# Altium PCB L电感测试仪.PCBDOC
Units mil, origin at the board's own origin, x right, y up, seen from the top; angles counter-clockwise.
Board outline 6000 x 4000 mil, 2 copper layers (Top Layer, Bottom Layer); 31 components, 45 nets, 243 pads, 0 vias.
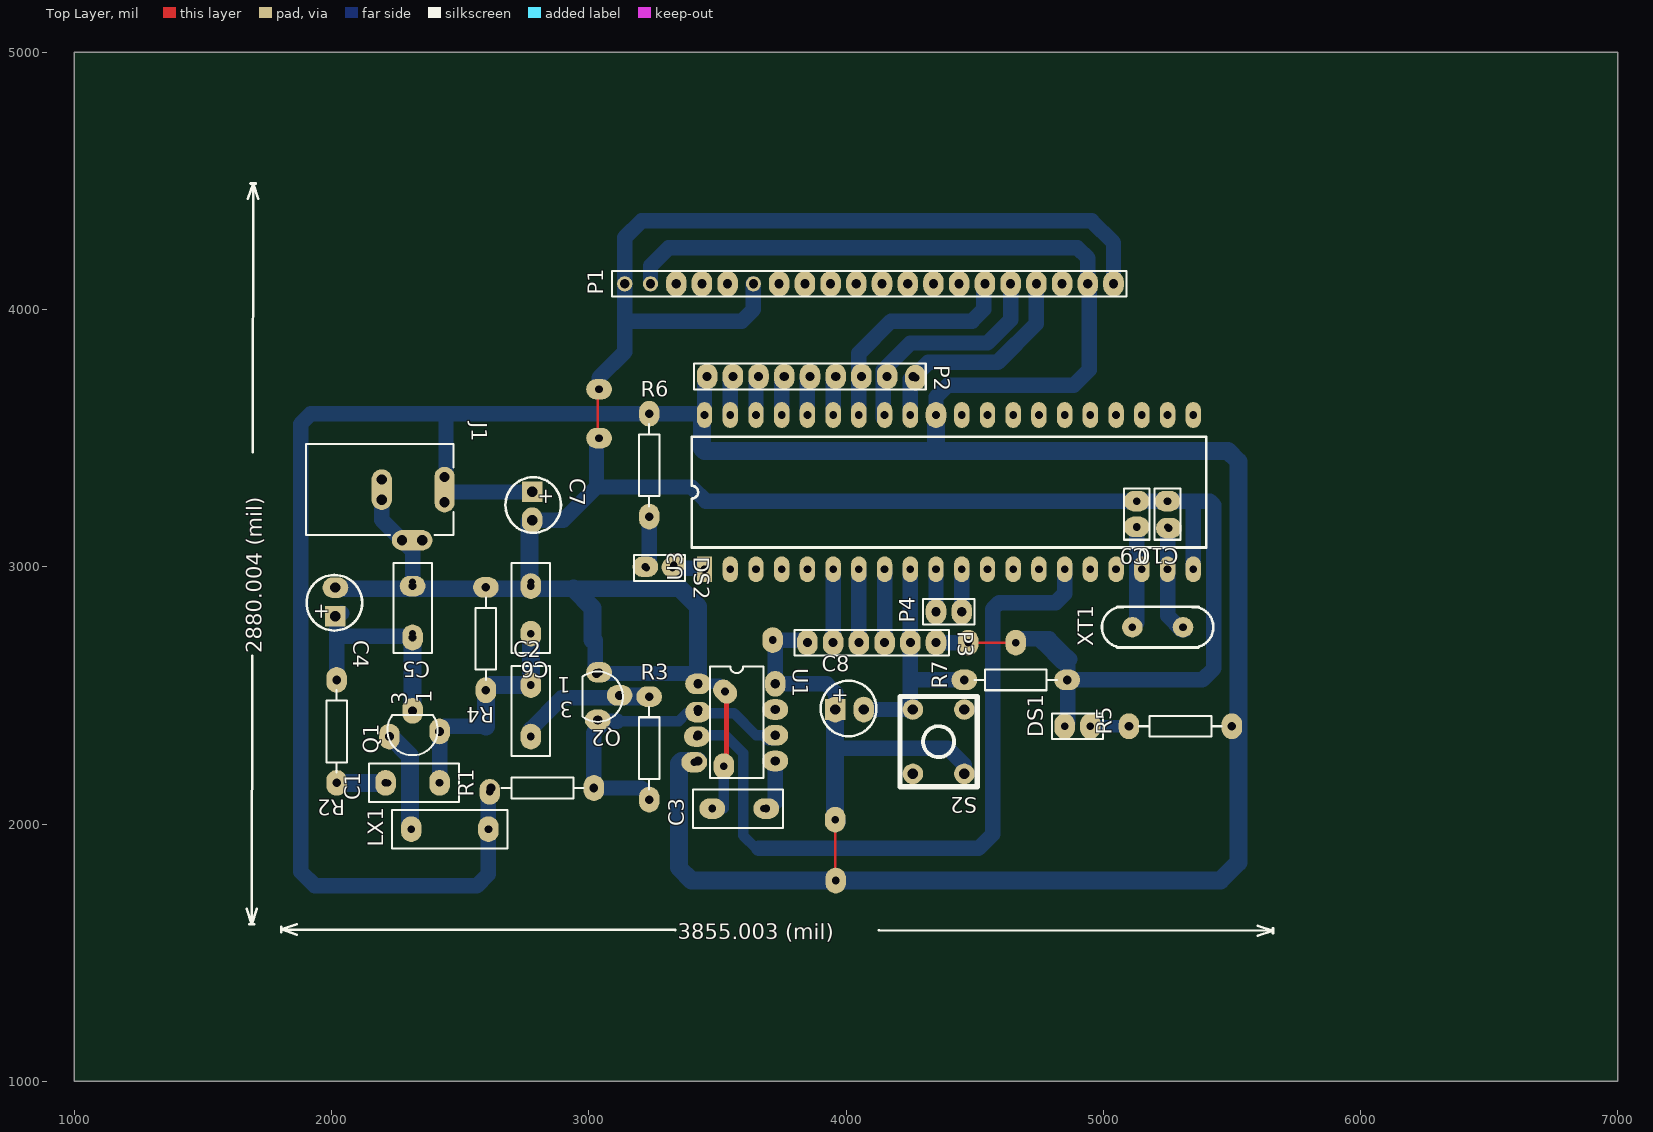
[diagram p0: Top Layer view]
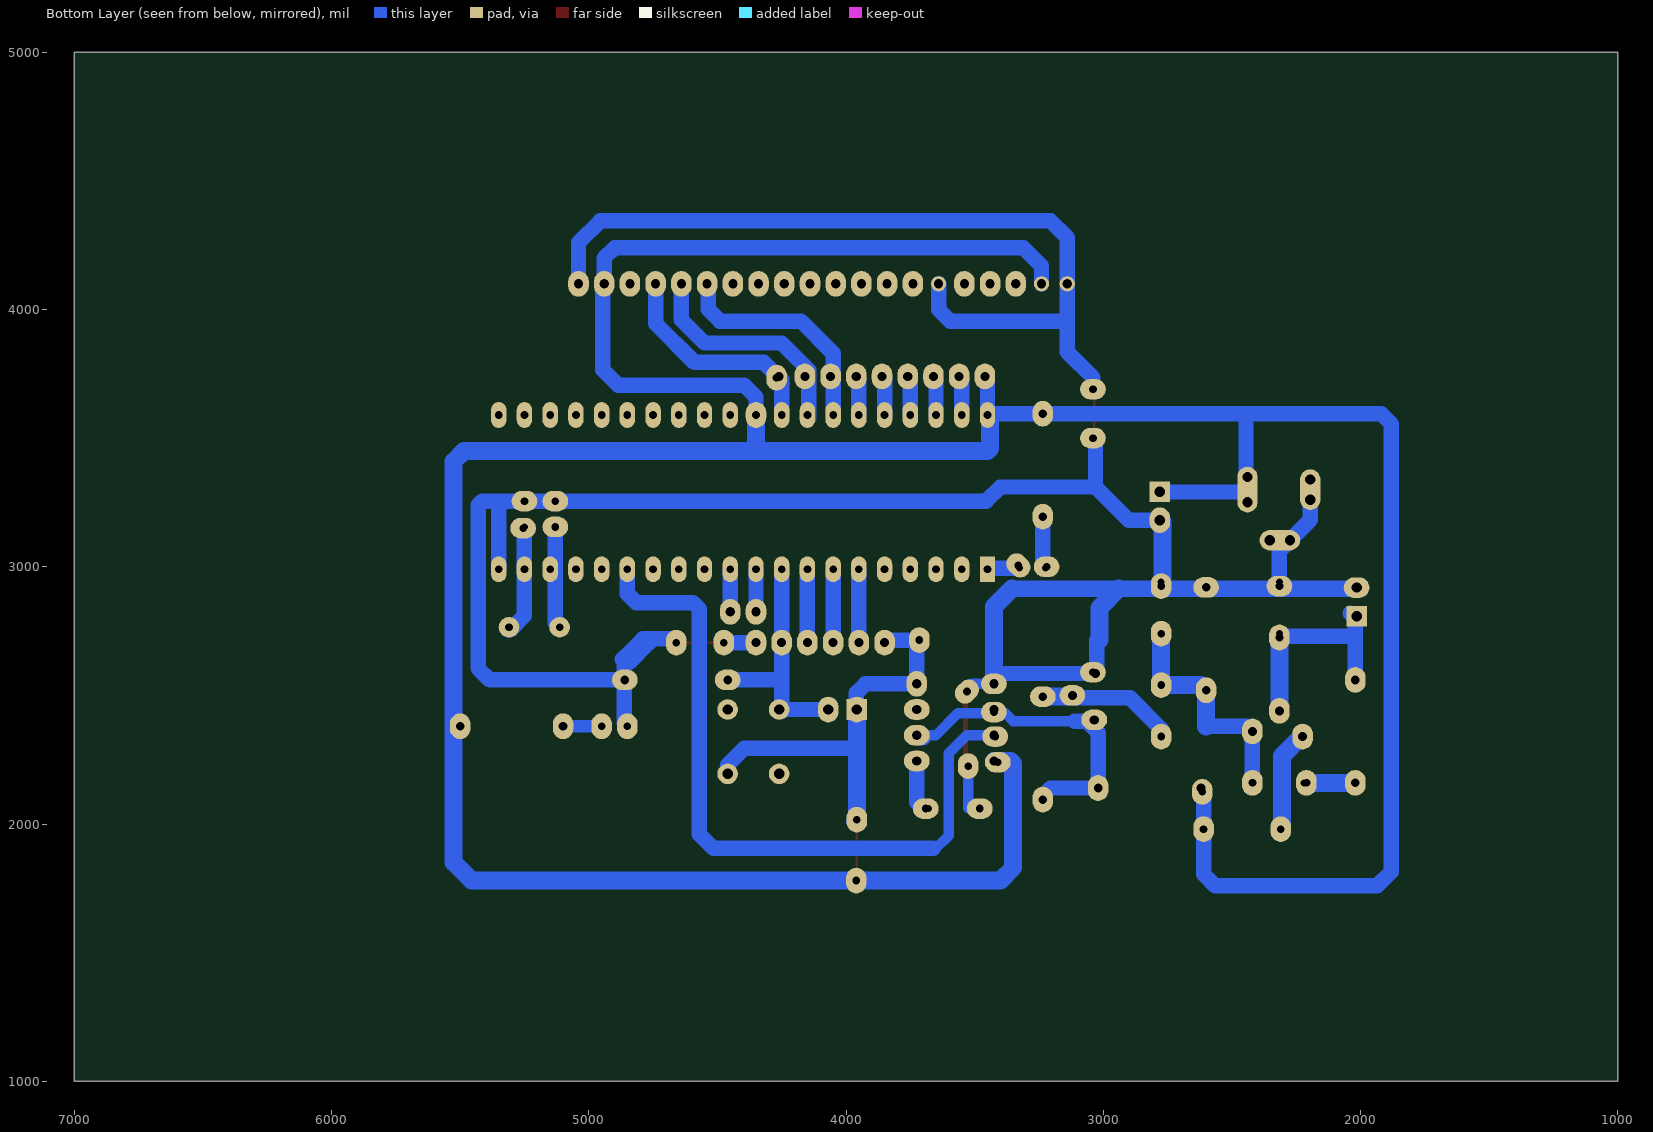
[diagram p1: Bottom Layer view, seen from below]

## Layer stack, top to bottom
Top Solder: solder mask 0.4, Solder Resist, Dk 3.5
Top Layer: signal copper 1.4
Dielectric1: dielectric 12.6, FR-4, Dk 4.8
Bottom Layer: signal copper 1.4
Bottom Solder: solder mask 0.4, Solder Resist, Dk 3.5

## Board outline
1000,1000 7000,1000 7000,5000 1000,5000

## Design rules (kind name [scope] priority, off if disabled: settings)
Clearance [All] p1: gap=10 ignorepadtopadclearanceinfootprint=FALSE except(0: Arc-Hole Track-Hole SMDPad-Hole THPad-Hole Via-Hole Fill-Hole Poly-Hole Region-Hole Text-Hole)
FabricationTestPointUsage TestPointUsage [All] p1: valid=0 allowmultiple=FALSE
FabricationTestpoint Testpoint [All] p1: side=3 testpointundercomponent=TRUE minsize=40 maxsize=100 preferedsize=60 minholesize=0 maxholesize=40 preferedholesize=32 testpointgrid=1 allowsidetop=TRUE allowsidebottom=TRUE usegrid=TRUE gridtolerance=0.01
PolygonConnect [All] p1: connectstyle=Relief reliefconductorwidth=10 reliefentries=4 polygonreliefangle="90 Angle" airgapwidth=10
RoutingVias [All] p1: holewidth=28 width=50 viastyle="Through Hole" minholewidth=28 minwidth=50 maxholewidth=28 maxwidth=50
SolderMaskExpansion [All] p1: expansion=4
Width [All] p1: maxlimit=100 minlimit=10 preferedwidth=60 toplayer_prefwidth=10 minimp=50.000000 maximp=50.000000 favimp=50.000000
28 further rules are at their usual default settings.

## Components (designator, comment, footprint, x,y, rotation, side; value= is the part's Value field where it differs from the comment)
C1 "Cap" RAD-0.2 2320,2160 r180 top
C2 "Cap" RAD-0.2 2775,2440 r90 top
C3 "Cap" RAD-0.2 3580,2060 r180 top
C4 "Cap Pol1" 电容 2035,2860 r90 top
C5 "Cap" RAD-0.2 2315,2840 r270 top
C6 "Cap" RAD-0.2 2775,2840 r270 top
C7 "Cap Pol1" 电容 2760,3240 r270 top
C8 "Cap Pol1" 电容 4010,2425 r0 top
C9 "Cap" RAD-0.1 5130,3205 r270 top
C10 "Cap" RAD-0.1 5250,3205 r270 top
DS1 "LED0" RAD-0.1 4900,2380 r180 top
DS2 "LED0" RAD-0.1 3275,2995 r0 top
J1 "PWR2.5" KLD-0202 1900,3300 r0 top
LX1 "Inductor" RAD-0.3 2460,1980 r180 top
P1 "12864" HDR1X20 5040,4100 r180 top
P2 "Header 9" HDR1X9 3460,3740 r0 top
P3 "Header 6H" HDR1X6 3850,2705 r0 top
P4 "Header 2" HDR1X2 4450,2825 r180 top
Q1 "2N3904" BCY-W3/E4#1 2315,2365 r90 top
Q2 "2N3904" BCY-W3/E4#2 3035,2495 r180 top
R1 "Res2" AXIAL-0.4 2820,2140 r180 top
R2 "Res2" AXIAL-0.4 2020,2360 r270 top
R3 "Res2" AXIAL-0.4 3235,2295 r90 top
R4 "Res2" AXIAL-0.4 2600,2720 r270 top
R5 "Res2" AXIAL-0.4 5300,2380 r180 top
R6 "Res2" AXIAL-0.4 3235,3395 r90 top
R7 "Res2" AXIAL-0.4 4660,2560 r180 top
S2 "SW-PB" 点动按键 4090,2605 r180 top
U1 "NE555N" DIP8 3575,2395 r270 top
U3 "STC89C52" AT89S52 3450,2990 r90 top
XT1 "12M" 圆晶振 5310,2765 r180 top

## Footprints (in the part's own frame and the unit in brackets; to place one, negate y for a bottom-side part, rotate by r counter-clockwise, add the part's x,y. Pads: shape width x height; smd on the part's side, far side on the other; paste and mask are expansions set on the pad)
AT89S52 [mil]
  rect 100x60 hole 30: 1(0,0)
  oval 100x60 hole 30: 2(0,-100) 3(0,-200) 4(0,-300) 5(0,-400) 6(0,-500) 7(0,-600) 8(0,-700) 9(0,-800) 10(0,-900) 11(0,-1000) 12(0,-1100) 13(0,-1200) 14(0,-1300) 15(0,-1400) 16(0,-1500) 17(0,-1600) 18(0,-1700) 19(0,-1800) 20(0,-1900) 21(600,-1900) 22(600,-1800) 23(600,-1700) 24(600,-1600) 25(600,-1500) 26(600,-1400) 27(600,-1300) 28(600,-1200) 29(600,-1100) 30(600,-1000) 31(600,-900) 32(600,-800) 33(600,-700) 34(600,-600) 35(600,-500) 36(600,-400) 37(600,-300) 38(600,-200) 39(600,-100) 40(600,0)
  silkscreen extent 85,-1950 515,50
AXIAL-0.4 [mm] "Resistor; 2 Leads"
  round 1.4 hole 0.85: 1(-5.08,0) 2(5.08,0)
  silkscreen extent -4.06,-1.02 4.06,1.02
BCY-W3/E4#1 [mm] "TO, Flat Index; 3 In-Line, Axial Leads; Body Dia. 4.7mm"
  oval 2x1 hole 0.9: 1(-0.127,-2.667) 2(1.905,0) 3(-0.635,2.286)
  silkscreen extent -2.48,-2.48 1.5,2.48
BCY-W3/E4#2 [mm] "TO, Flat Index; 3 In-Line, Axial Leads; Body Dia. 4.7mm"
  oval 2x1 hole 0.9: 1(0.127,-2.286) 2(-2.159,-0.127) 3(0,2.286)
  silkscreen extent -2.48,-2.48 1.5,2.48
DIP8 [mm] "DIP; 8 Leads; Row Spacing 7.62 mm; Pitch 2.54 mm"
  rect 1.5x1.5 hole 0.9: 1(-3.81,-3.81)
  round 1.5 hole 0.9: 2(-1.27,-3.81) 3(1.27,-3.81) 4(3.81,-3.81) 5(3.81,3.81) 6(1.27,3.81) 7(-1.27,3.81) 8(-3.81,3.81)
  silkscreen extent -5.5,-2.65 5.5,2.65
HDR1X2 [mm] "Connector; Header; 2 Position"
  rect 1.5x1.5 hole 0.9: 1(0,0)
  round 1.5 hole 0.9: 2(2.54,0)
  silkscreen extent -1.27,-1.27 3.81,1.27
HDR1X6 [mm] "Connector; Header; 6 Position"
  rect 1.5x1.5 hole 0.9: 1(0,0)
  round 1.5 hole 0.9: 2(2.54,0) 3(5.08,0) 4(7.62,0) 5(10.16,0) 6(12.7,0)
  silkscreen extent -1.27,-1.27 13.97,1.27
HDR1X9 [mm] "Connector; Header; 9 Position"
  rect 1.5x1.5 hole 0.9: 1(0,0)
  round 1.5 hole 0.9: 2(2.54,0) 3(5.08,0) 4(7.62,0) 5(10.16,0) 6(12.7,0) 7(15.24,0) 8(17.78,0) 9(20.32,0)
  silkscreen extent -1.27,-1.27 21.59,1.27
HDR1X20 [mm] "Connector; Header; 20 Position"
  rect 1.5x1.5 hole 0.9: 1(0,0)
  round 1.5 hole 0.9: 2(2.54,0) 3(5.08,0) 4(7.62,0) 5(10.16,0) 6(12.7,0) 7(15.24,0) 8(17.78,0) 9(20.32,0) 10(22.86,0) 11(25.4,0) 12(27.94,0) 13(30.48,0) 14(33.02,0) 15(35.56,0) 16(38.1,0) 17(40.64,0) 18(43.18,0) 19(45.72,0) 20(48.26,0)
  silkscreen extent -1.27,-1.27 49.53,1.27
KLD-0202 [mm] "DC Power Jack, 2.5mm, KLD Series, PCB Mount"
  oval 2x4.5 all layers, no hole: 1(13.7,0)
  round 1.5 hole 1: 1A(13.7,-1.25) 1B(13.7,1.25) 2A(7.5,-1) 2B(7.5,1) 3A(9.5,-5) 3B(11.5,-5)
  oval 2x4 all layers, no hole: 2(7.5,0)
  oval 4x2 all layers, no hole: 3(10.5,-5)
  silkscreen extent 0,-4.5 14.6,4.5
RAD-0.1 [mm] "Indicating Instrument; 2 Leads"
  round 1.2 hole 0.7: 1(-1.27,0) 2(1.27,0)
  silkscreen extent -2.54,-1.27 2.54,1.27
RAD-0.2 [mm] "Jumper Wire; 2 Leads"
  round 1.2 hole 0.7: 1(-2.54,0) 2(2.54,0)
  silkscreen extent -4.44,-1.91 4.44,1.9
RAD-0.3 [mm] "Capacitor; 2 Leads"
  round 1.2 hole 0.7: 1(-3.81,0) 2(3.81,0)
  silkscreen extent -5.71,-1.91 5.71,1.91
圆晶振 [mil]
  round 80 hole 30: 1(0,0) 2(196.85,0)
  silkscreen extent -118,-79 315,79
点动按键 [mil]
  round 80 hole 40: 1(-370,410) 2(-170,160) 3(-370,160) 4(-170,410)
  silkscreen extent -420,110 -120,460
电容 [mil]
  rect 80x80 hole 40: 1(-52,20)
  round 80 hole 40: 2(59,20)
  silkscreen extent -108,-84 108,132

## Part data
C1 C2 C3 C5 C6 C9 C10: "Capacitor"
C4 C7 C8: "Polarized Capacitor (Radial)"
DS1 DS2: "Typical INFRARED GaAs LED"
J1: "Low Voltage Power Supply Connector"
P2: "Header, 9-Pin"
P3: "Header, 6-Pin, Right Angle"
P4: "Header, 2-Pin"
Q1 Q2: "NPN General Purpose Amplifier"
R1 R2 R3 R4 R5 R6 R7: "Resistor"
S2: "Switch"
U1: "General-Purpose Single Bipolar Timer"
U3: library part AT89S52
XT1: library part XTAL2

## Free pads (board coordinates)
  oval 100x80 hole 30: 0(3725,2445) 6(3040,3690) 7(3040,3500) 9(2315,2925) 10(2015,2919) 28(3035,2405) 29(3120,2500) 30(3235,2495) 31(3040,2590) 35(2600,2920) 39(3220,3000) 53(5130,3255) 54(5250,3255) 55(5130,3155) 56(5255,3150) 57(4860,2560) 58(4460,2560) 71(3725,2345) 72(3725,2245) 73(3425,2435) 74(3420,2340) 75(3425,2545) 76(3410,2240) 77(3480,2060) 78(3690,2060)
  oval 80x100 hole 30: 0(3958,2017) 1(3960,1780) 1(4475,2705) 2(4660,2705) 3(3525,2225) 3(4850,2380) 4(4950,2380) 5(5100,2380) 6(5500,2380) 11(2020,2560) 12(2315,2725) 13(2315,2440) 14(2420,2360) 15(2225,2340) 16(2210,2160) 17(2020,2160) 18(2310,1980) 19(2610,1980) 20(2615,2125) 21(2420,2160) 22(2600,2520) 23(2775,2740) 24(2775,2540) 25(2775,2340) 26(3020,2140) 27(3235,2095) 36(2775,2925) 37(2780,3181) 38(3235,3195) 41(3235,3595) 42(3460,3740) 43(3560,3740) 44(3660,3740) 45(3760,3740) 46(3860,3740) 47(3960,3740) 48(4060,3740) 49(4060,3740) 50(4160,3740) 51(4270,3735) 52(4350,3590) 59(4350,2705) 60(4250,2705) 61(4350,2825) 62(4450,2825) 63(4150,2705) 64(4050,2705) 65(3950,2705) 66(3850,2705) 67(3715,2715) 68(4069,2445) 69(3958,2445) 70(3725,2545) 97(3340,4100) 98(3440,4100) 99(3540,4100) 101(3740,4100) 102(3840,4100) 103(3940,4100) 104(4040,4100) 105(4140,4100) 106(4240,4100) 107(4340,4100) 108(4440,4100) 109(4540,4100) 110(4640,4100) 111(4740,4100) 112(4840,4100) 113(4940,4100) 114(5040,4100)
  oval 80x100 hole 30 rot 45: 2(3530,2515)
  oval 80x100 hole 30 rot 135: 40(3330,3005)

## Nets (pads, with @x,y where several pads share a name; then routed paths per layer and width w, separated by ;. In a path a pad name is that pad's centre, name@x,y a point inside that pad or via, vN(x,y) a via of type N, cw(c..) or ccw(c..) an arc to the next point about the centre after c; other vN are vias at no path point)
ALE: U3.30
FL: pad.74 U1.3 U3.15 | length 2827.3
  Bottom Layer w40: U1.3 3530,2345 3600,2275 3600,1955 3650,1905 3660,1905
  Bottom Layer w60: 3660,1905 4515,1905 4570,1960 4570,2835 4595,2860 4815,2860 4850,2895 U3.15@4850,3005
GND: C3.2 C4.2 C5.1 C6.1 C7.2 C9.1 C10.1 DS1.2 J1.2 J1.2A J1.2B J1.3 J1.3A J1.3B P1.1 P1.15 P1.20 P3.6 pad.1@4475,2705 pad.2 pad.3 pad.6@3040,3690 pad.7 pad.9 pad.10 pad.31 pad.35 pad.36 pad.37 pad.53 pad.54 pad.57 pad.59 pad.75 pad.77 pad.114 Q2.1 R4.1 R7.1 U1.1 U3.20 | length 13051.1
  Top Layer w10: pad.7@3035,3515 pad.6@3035,3680 ; pad.3@3530,2210 pad.2@3530,2515 ; pad.3@3540,2240 pad.2@3540,2510 ; pad.1@4475,2705 4655,2705 pad.2@4670,2690
  Top Layer w40: pad.7@3035,3515 3035,3505 pad.7 ; pad.6@3035,3680 pad.6@3035,3700
  Bottom Layer w40: pad.75 3510,2545 3530,2525 3530,2515 pad.2@3530,2500 ; pad.77 3525,2060 3525,2225 pad.3@3525,2230
  Bottom Layer w60: J1.2 2195.28,3181.89 J1.3A 2315,3062.17 C5.1 pad.9@2315,2930 ; C6.1 pad.36@2780,2945 ; pad.37@2780,3175 pad.37 2901,3181 3030,3310 ; pad.31@3025,2600 3025,2715 ; pad.7@3025,3505 3030,3500 3030,3310 ; Q2.1 3410,2585 ; pad.6@3035,3680 3040,3685 3040,3690 3040,3735 3140,3835 3140,3955 ; pad.75 pad.75@3425,2555 ; P1.15 3640,4000 3595,3955 3140,3955 ; pad.59 4475,2705 pad.1@4485,2715 ; pad.2@4675,2720 4790,2720 4861.89,2648.11 ; 4765,2705 4841.89,2628.11 ; DS1.2 4861.89,2391.89 4861.89,2648.11 ; pad.57@4870,2560 5385,2560 5430,2605 5430,3240 5415,3255 5335,3255 ; 4870,2640 4861.89,2648.11 ; pad.114 5040,4260 4955,4345 3205,4345 3140,4280 P1.20 3140,3955 ; U3.20 5350,3240 5335,3255 ; 3030,3310 3400,3310 3455,3255 pad.53 pad.54 5335,3255
  Bottom Layer w65: pad.10@2005,2915 2760,2915 2940,2915 3355,2915
  Bottom Layer w70: pad.36@2760,2915 2770,2925 pad.37@2770,3175 ; 2940,2915 3015,2840 3015,2715 ; 3355,2915 3425,2845 pad.75@3425,2555
NetC1_1: C1.1 C2.2 C6.2 pad.14 pad.21 pad.22 pad.23 pad.24 Q1.1 R4.2 | length 901.6
  Bottom Layer w60: pad.21 pad.14 2440,2380 2590,2380
  Bottom Layer w70: 2600,2380 pad.22 2620,2540 pad.24 pad.23
NetC1_2: C1.2 pad.16 pad.17 R2.2 | length 345
  Bottom Layer w60: pad.17@2035,2160 pad.16@2200,2160
  Bottom Layer w70: pad.17 pad.16@2200,2160
NetC2_1: C2.1 pad.25 pad.29 pad.30 Q2.2 R3.2 | length 663.8
  Bottom Layer w60: pad.25 2775,2370 2895,2490 3215,2490 3225,2500 pad.29@3095,2500
NetC3_1: C3.1 pad.72 pad.78 U1.5 | length 222.4
  Bottom Layer w60: pad.78@3675,2055 3695,2055 3725,2085 pad.72
NetC4_1: C4.1 C5.2 pad.11 pad.12 pad.13 Q1.2 R2.1 | length 852.4
  Bottom Layer w60: pad.11 2020,2800 C4.1@2040,2820 ; 2020,2725 2025,2730 pad.12@2310,2730
  Bottom Layer w70: pad.12@2310,2730 pad.12 pad.13
NetDS1_1: DS1.1 pad.4 pad.5 R5.2 | length 150
  Bottom Layer w50: DS1.1 R5.2
NetDS2_1: DS2.1 pad.38 pad.39 R6.1 | length 204.1
  Bottom Layer w60: DS2.1 3235,3005 pad.38
NetLX1_2: LX1.2 pad.15 pad.18 Q1.3 | length 398.1
  Bottom Layer w70: pad.15 2230,2340 2305,2265 2305,1985 pad.18
NetQ2_3: pad.26 pad.27 pad.28 pad.71 pad.73 Q2.3 R1.1 R3.1 U1.2 U1.6 | length 1248.7
  Bottom Layer w40: 3110,2400 3350,2400 3380,2430 3565,2430 3650,2345 pad.71
  Bottom Layer w60: 3110,2400 3065,2400 3020,2355 pad.26 3205,2140 3235,2110 pad.27 ; pad.71@3700,2335 pad.71@3720,2335
P00: P2.2 pad.43 U3.39 | length 154.1
  Bottom Layer w60: U3.39 3550,3730 pad.43
P01: P2.3 pad.44 U3.38 | length 154.1
  Bottom Layer w60: U3.38 3650,3730 pad.44
P02: P2.4 pad.45 U3.37 | length 147.1
  Bottom Layer w60: U3.37 3750,3730 pad.45@3755,3735
P03: P2.5 pad.46 U3.36 | length 154.1
  Bottom Layer w60: U3.36 3850,3730 pad.46
P04: P2.6 pad.47 U3.35 | length 154.1
  Bottom Layer w60: U3.35 3950,3730 pad.47
P05: P1.6 P2.7 pad.48 pad.49 pad.109 U3.34 | length 899.6
  Bottom Layer w60: U3.34 4050,3830 4175,3955 4490,3955 4535,4000 pad.109@4535,4090 ; pad.49@4050,3730 pad.49
P06: P1.5 P2.8 pad.50 pad.110 U3.33 | length 914.9
  Bottom Layer w60: U3.33@4145,3580 4145,3765 4250,3870 4550,3870 4640,3960 pad.110 ; pad.50@4150,3730 pad.50
P07: P1.4 P2.9 pad.51 pad.111 U3.32 | length 885.3
  Bottom Layer w60: U3.32 4250,3725 4320,3795 4590,3795 4740,3945 pad.111 ; pad.51@4250,3730 P2.9
P10: DS2.2 pad.40 U3.1 | length 127.1
  Bottom Layer w60: DS2.2 3445,2995 U3.1
P11: U3.2
P12: U3.3
P13: U3.4
P14: U3.5
P15: P3.2 pad.65 U3.6 | length 285
  Bottom Layer w60: pad.65 U3.6
P16: P3.3 pad.64 U3.7 | length 285
  Bottom Layer w60: pad.64 U3.7
P17: P3.4 pad.63 U3.8 | length 285
  Bottom Layer w60: pad.63 U3.8
P20: U3.21
P21: U3.22
P22: U3.23
P23: U3.24
P24: U3.25
P25: U3.26
P26: U3.27
P27: U3.28
P30: P4.2 pad.61 U3.10 | length 165
  Bottom Layer w60: pad.61 U3.10
P31: P4.1 pad.62 U3.11 | length 165
  Bottom Layer w60: pad.62 U3.11
P33: U3.13
P34: U3.14
PSEN: U3.29
RST: C8.2 P3.5 pad.58 pad.60 pad.68 R7.2 S2.2 U3.9 | length 945.1
  Bottom Layer w60: pad.68 S2.2@4250,2445 ; S2.2@4245,2440 S2.2@4250,2445 ; 4250,2565 4255,2560 pad.58 ; U3.9 S2.2@4250,2445
VCC: C7.1 C8.1 J1.1 J1.1A J1.1B LX1.1 P1.2 P1.19 P2.1 P3.1 pad.0@3958,2017 pad.1@3960,1780 pad.6@5500,2380 pad.19 pad.20 pad.41 pad.42 pad.52 pad.66 pad.67 pad.69 pad.70 pad.76 pad.113 R1.2 R5.1 R6.2 S2.1 U1.4 U1.8 U3.31 U3.40 | length 16759.3
  Top Layer w10: pad.1@3958,1783 pad.0@3958,2017
  Bottom Layer w60: pad.20@2610,2140 pad.19 2610,1805 2565,1760 1935,1760 1880,1815 1880,3555 1920,3595 2445,3595 ; C7.1 2445,3290 2445,3595 ; P1.19 3240,4170 3310,4240 4900,4240 4940,4200 pad.113 ; U3.40@3440,3595 2445,3595 ; U3.40 3450,3730 pad.42 ; pad.66@3845,2710 3840,2715 3725,2715 pad.70 3925,2545 3960,2510 3960,2320 ; 3958,2312 3975,2295 4395,2295 S2.1@4460,2230 ; pad.52@4350,3570 pad.52 4350,3660 4395,3705 4885,3705 4945,3765 pad.113@4945,4090
  Bottom Layer w70: U1.4 3360,2245 3350,2235 3350,1830 3400,1780 3960,1780 5455,1780 5525,1850 5525,3410 5485,3450 4340,3450 ; U3.40@3440,3595 3440,3460 3450,3450 4340,3450 ; pad.69 3958,2312 3958,2017 pad.0@3965,2010 ; pad.52@4350,3570 4350,3460 4340,3450
XT1: C10.2 pad.56 U3.19 XT1.1 | length 432.8
  Bottom Layer w60: C10.2 5250,2810 5305,2755 XT1.1@5315,2755
XT2: C9.2 pad.55 U3.18 XT1.2 | length 397
  Bottom Layer w60: XT1.2 5130,2781.85 pad.55
pads on no net: P1.3 P1.7 P1.8 P1.9 P1.10 P1.11 P1.12 P1.13 P1.14 P1.16 P1.17 P1.18 S2.3 S2.4 U1.7 U3.12 U3.16 U3.17

## Silkscreen, mask and mechanical layers (free items; w line width, h text height)
Top Overlay:
  lines w10: 1670.1,1670.03 1690,1610 ; 1674.9,4430.03 1695,4490 ; 1680,1610.02 1700,1609.98 ; 1685,4490.02 1705,4489.98 ; 1691.81,2654.12 1690,1610 ; 1693.19,3445.88 1695,4490 ; 1710.1,1669.97 1690,1610 ; 1714.9,4429.97 1695,4490 ; 1804.99,1580 1805.01,1600 ; 1864.97,1569.92 1805,1590 ; 1865.03,1609.92 1805,1590 ; 3336.62,1588.01 1805,1590 ; 4128.38,1586.99 5660,1585 ; 5599.97,1565.08 5660,1585 ; 5600.03,1605.08 5660,1585 ; 5659.99,1575 5660.01,1595
  text "2880.004 (mil)" at 1727.82,2664.06 h60 r89.9
  text "3855.003 (mil)" at 3346.58,1552.01 h60 r359.93

## Text inside footprints (layer, text, board x,y; h text height)
C4: Top Overlay "+" at 1985,2793 h60 r90
C7: Top Overlay "+" at 2810,3307 h60 r270
C8: Top Overlay "+" at 3943,2475 h60
J1: Mechanical 1 "Mech 2 - Clearance, move to internal plane if present" at 1911.26,3499.44 h11.81; Mechanical 1 "Mech 1 - Slot cut-out" at 1911.26,3519.13 h11.81; Mechanical 1 "Assign keep-out area to slot" at 1911.26,3558.5 h11.81; Mechanical 1 "Alert PCB fab to slot details" at 1911.26,3538.82 h11.81
Q1: Top Overlay "3" at 2294.92,2460.67 h59.05 r90; Top Overlay "1" at 2389.8,2469.72 h59.05 r90
Q2: Top Overlay "3" at 2939.33,2474.92 h59.05 r180; Top Overlay "1" at 2930.28,2569.8 h59.05 r180